# Altium PCB CH32F103C-R0-1v1.PcbDoc
Units mil, origin at the board's own origin, x right, y up, seen from the top; angles counter-clockwise.
Board outline 1801.31 x 2018.15 mil, 2 copper layers (TopLayer, BottomLayer); 40 components, 57 nets, 204 pads, 156 vias.
Unrouted connection lines stored in the file: 2.
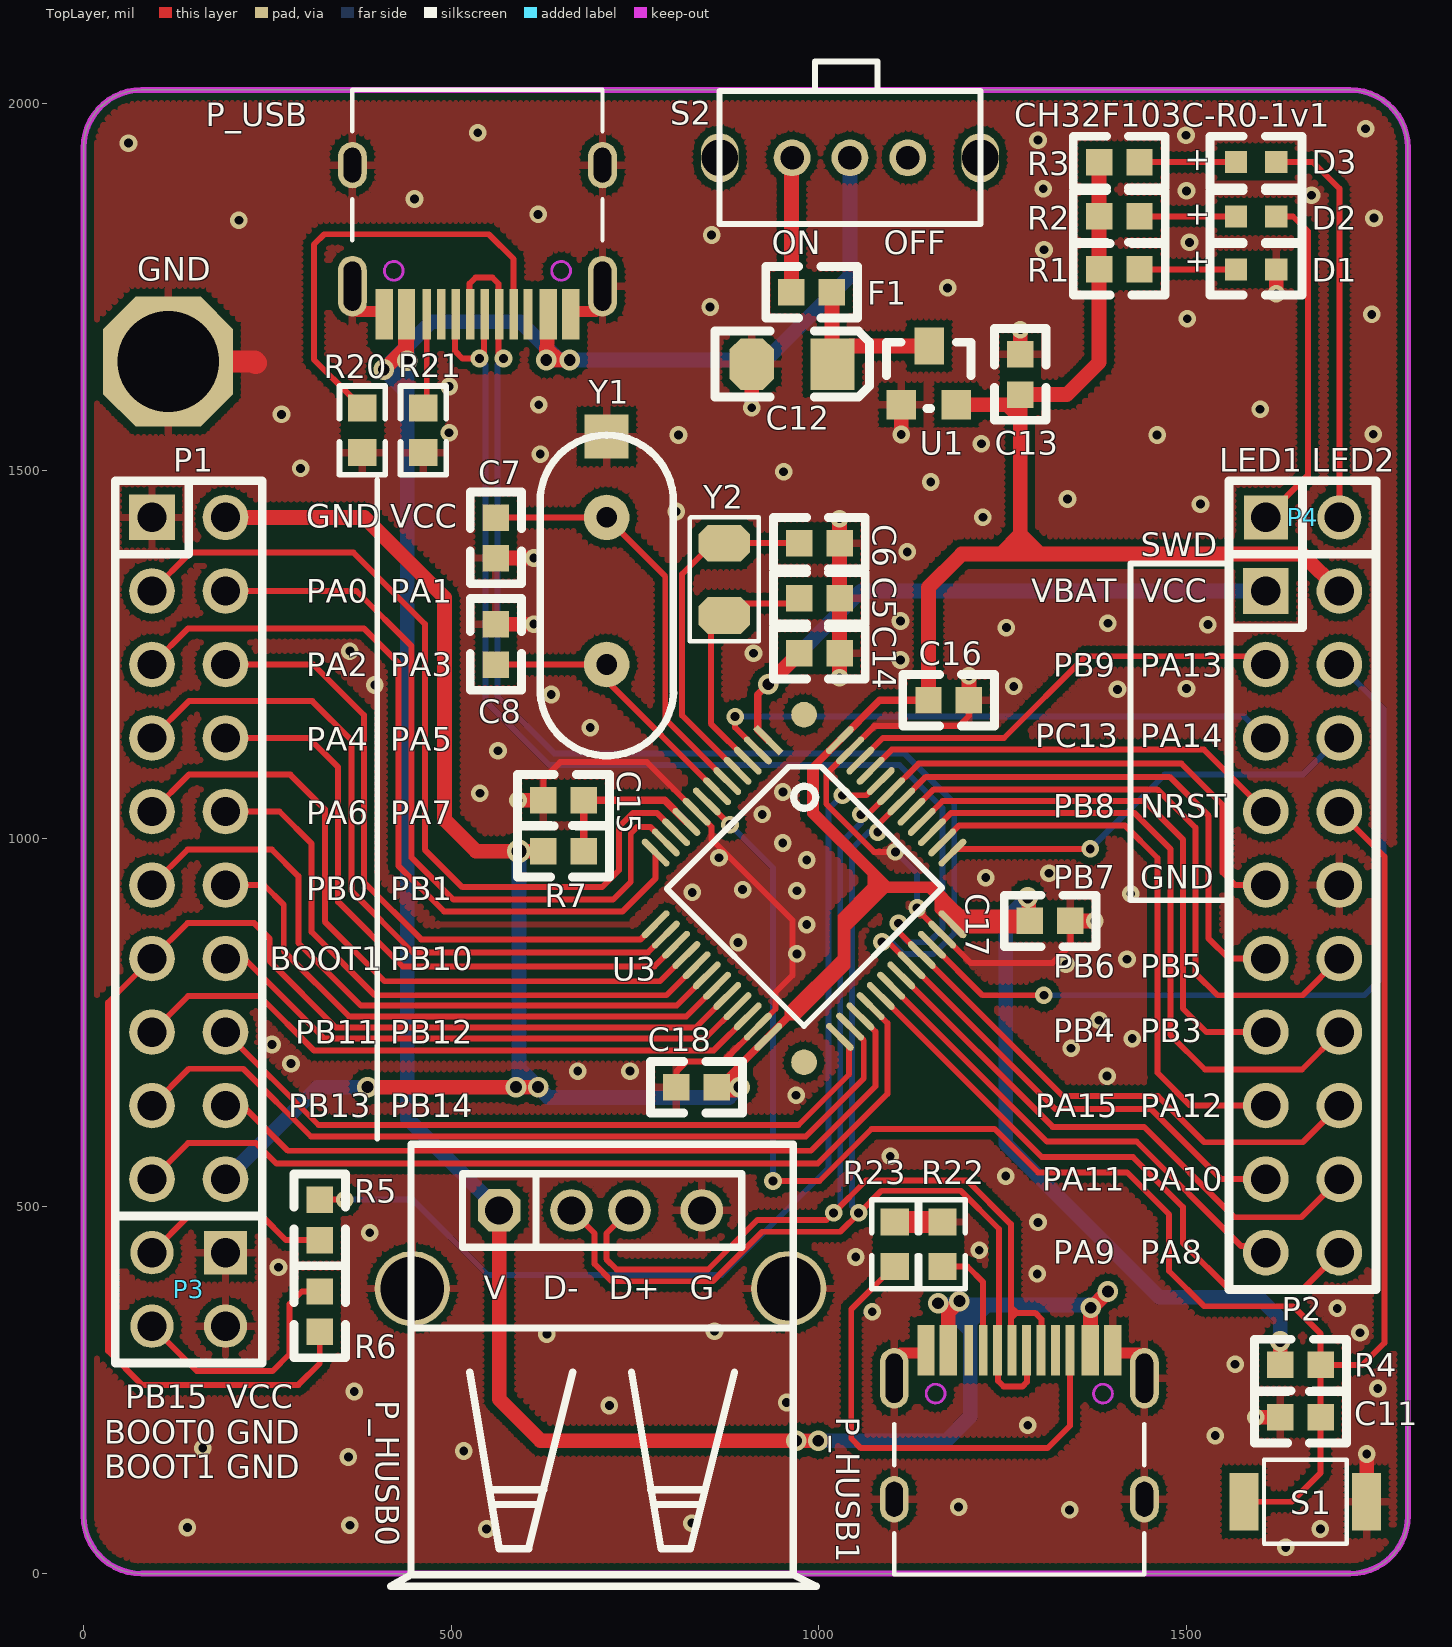
[diagram p0: TopLayer view]
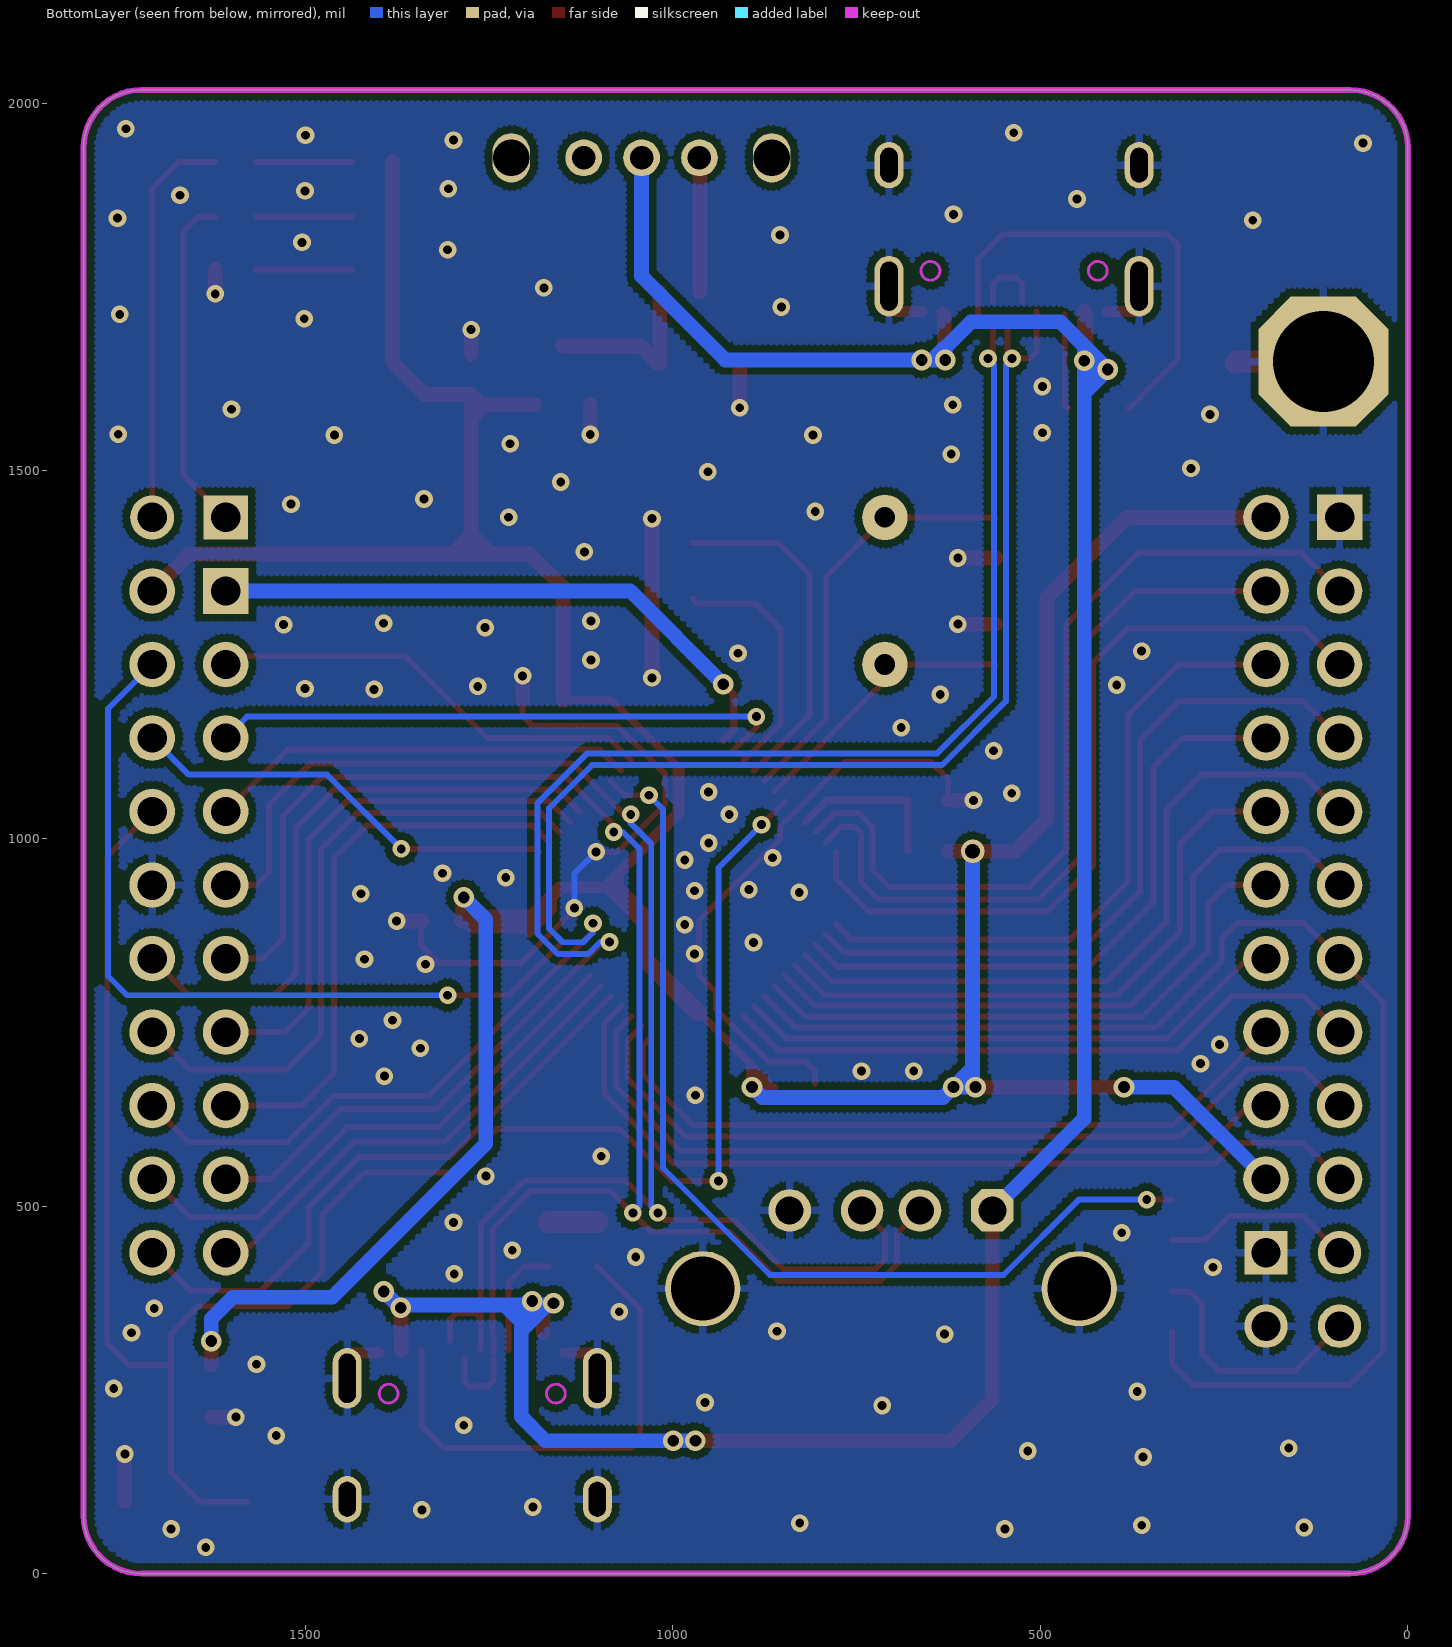
[diagram p1: BottomLayer view, seen from below]

## Layer stack, top to bottom
TopSolder: solder mask 0.4, Solder Resist, Dk 3.5
TopLayer: signal copper 1.4
Dielectric1: dielectric 12.6, FR-4, Dk 4.8
BottomLayer: signal copper 1.4
BottomSolder: solder mask 0.4, Solder Resist, Dk 3.5

## Board outline
0,78.74 0,1939.41 cw(c78.74,1939.41) 78.74,2018.15 1722.6,2018.15 cw(c1722.6,1939.43) 1801.31,1939.43 1801.31,78.74 cw(c1722.57,78.74) 1722.57,0 78.74,0 cw(c78.74,78.74)

## Design rules (kind name [scope] priority, off if disabled: settings)
Clearance Clearance_1 [InPolygon] p1: gap=10 ignorepadtopadclearanceinfootprint=FALSE
Clearance [All] p2: gap=6 ignorepadtopadclearanceinfootprint=FALSE
ComponentClearance [All] p1 off: gap=10 collisioncheckmode=3 verticalgap=10 showdistances=FALSE
DiffPairsRouting [All] p1: maxlimit=10 minlimit=7 mostfreqgap=8 toplayer_minwidth=6 toplayer_maxwidth=15 toplayer_prefwidth=8 bottomlayer_minwidth=6 bottomlayer_maxwidth=15 bottomlayer_prefwidth=8 maxuncoupledlength=500
MinimumSolderMaskSliver [All] p1 off: minsoldermaskwidth=10
PolygonConnect PolygonConnect_1 [IsVia] p1: connectstyle=Direct reliefconductorwidth=10 reliefentries=4 polygonreliefangle="90 Angle" airgapwidth=10
PolygonConnect [All] p2: connectstyle=Relief reliefconductorwidth=10 reliefentries=4 polygonreliefangle="90 Angle" airgapwidth=10
RoutingVias [All] p1: holewidth=16 width=28 viastyle="Through Hole" minholewidth=12 minwidth=24 maxholewidth=28 maxwidth=50
SilkToSilkClearance [All] p1 off: silktosilkclearance=10
SilkToSolderMaskClearance [IsPad] p1 off: minsilkscreentomaskgap=10 clearancetoexposedcopper=TRUE
SolderMaskExpansion [All] p1: expansion=4 istentingtop=FALSE
Width [All] p1: maxlimit=100 minlimit=6 preferedwidth=10
25 further rules are at their usual default settings.

## Components (designator, comment, footprint, x,y, rotation, side; value= is the part's Value field where it differs from the comment)
C5 "12pF" 0603#1 973.18,1326.77 r0 top
C6 "12pF" 0603#1 973.18,1401.74 r0 top
C7 "22pF" 0603#1 560.83,1381.38 r90 top
C8 "22pF" 0603#1 560.83,1291.48 r270 top
C11 "0.1uF" 0603#1 1627.52,212.92 r0 top
C12 "10uF" 3216 1018.83,1645.26 r0 top
C13 "2.2uF" 0603#1 1274.18,1603.8 r90 top
C14 "0.1uF" 0603#1 973.18,1251.8 r0 top value=15pF
C15 "0.1uF" 0603#1 680.18,1051.8 r180 top value=15pF
C16 "0.1uF" 0603#1 1204.18,1187.8 r180 top value=15pF
C17 "0.1uF" 0603#1 1342.18,887.8 r180 top value=15pF
C18 "0.1uF" 0603#1 806.18,661.8 r0 top value=15pF
D1 "POWER  red" 0603L 1567.18,1774 r0 top
D2 "LED1" 0603L 1567.18,1846 r0 top
D3 "LED2" 0603L 1567.18,1920 r0 top
F1 "500mA" 0603#1 962.83,1742.76 r0 top
P1 "Header 10X2" IDC20 93.04,1436.61 r270 top
P2 "Header 10X2" IDC20 1607.99,1336.61 r270 top
P3 "Header 2X2" HDR2X2 193.05,436.62 r180 top
P4 "2HEAD" "SIP2 - 40mil" 1607.99,1436.61 r0 top
P_HUSB0 "USB_A" USBA-l 565.29,494.1 r0 top
P_HUSB1 "TYPE-C" TYPE-C-Receptacle-2.0 1272.68,303.99 r0 top
P_USB "TYPE-C" TYPE-C-Receptacle-2.0 535.68,1713 r180 top
R1 "1K" 0603#1 1436.18,1774 r180 top
R2 "1K" 0603#1 1381.18,1846 r0 top
R3 "1K" 0603#1 1381.18,1920 r0 top
R4 "10K" 0603#1 1682.52,283.92 r180 top
R5 "10K" 0603#1 321.18,508.8 r270 top
R6 "10K" 0603#1 321.18,328.8 r90 top
R7 "0Ω" 0603#1 625.18,982.8 r0 top value=10K
R20 "NC(5.1K)" 0603#2 379.18,1585.43 r270 top
R21 "NC(5.1K)" 0603#2 462.18,1585.43 r270 top
R22 "NC(5.1K)" 0603#2 1168.18,417.8 r90 top
R23 "NC(5.1K)" 0603#2 1103.18,417.8 r90 top
S1 "KEY" 贴片按键 1578.18,97.8 r0 top
S2 "SW" KEY2 1199.83,1925.76 r180 top
U1 "6219P33M" "SOT-23 - IC" 1112.18,1589.8 r0 top
U3 "CH32F103C" LQFP48 931.18,1133.8 r225 top locked
Y1 "8M" XT62/28 711.45,1236.61 r0 top
Y2 "32.768k" FC-135 871.58,1303.24 r90 top

## Footprints (in the part's own frame and the unit in brackets; to place one, negate y for a bottom-side part, rotate by r counter-clockwise, add the part's x,y. Pads: shape width x height; smd on the part's side, far side on the other; paste and mask are expansions set on the pad)
0603#1 [mil]
  rect 36x36 smd: 1(0,0) 2(55,0)
  silkscreen extent -35,-35 90,35
0603#2 [mil]
  rect 36.61x38.58 smd: 1(0,0) 2(60.63,0)
  silkscreen extent -30,-31 91,31
0603L [mil]
  rect 30x30 smd: 1(0,0) 2(55,0)
  silkscreen extent -35,-35 90,35
3216 [mil]
  rect 60x70 smd: 1(0,0)
  oct 60x70 smd: 2(-110,0)
  silkscreen extent -160,-45 50,45
FC-135 [mil]
  oct 50x70 smd: 1(0,0) 2(98.43,0)
  silkscreen extent -35,-47 133,47
HDR2X2 [mm]
  rect 1.5x1.5 hole 1.016: 1(0,0)
  round 1.5 hole 1.016: 2(0,2.54) 3(2.54,0) 4(2.54,2.54)
  silkscreen extent -1.27,-1.27 3.81,3.81
IDC20 [mil]
  rect 62x62 hole 40: 1(0,0)
  round 62 hole 40: 2(0,100) 3(100,0) 4(100,100) 5(200,0) 6(200,100) 7(300,0) 8(300,100) 9(400,0) 10(400,100) 11(500,0) 12(500,100) 13(600,0) 14(600,100) 15(700,0) 16(700,100) 17(800,0) 18(800,100) 19(900,0) 20(900,100)
  silkscreen extent -50,-50 950,150
KEY2 [mm]
  oval 1.3x1.7 hole 1.27: 0(-0.5,0) 0(8.5,0)
  round 1.27 hole 0.813: 1(4,0) 2(2,0) 3(6,0)
  silkscreen extent -0.51,-3.32 8.5,2.29
LQFP48 [mm]
  round 0.889 smd: 0(-1.496,0.254) 0(6.996,8.746)
  rect 0.229x1.27 smd: 1(0,0)
  oval 0.229x1.27 smd: 2(0.5,0) 3(1,0) 4(1.5,0) 5(2,0) 6(2.5,0) 7(3,0) 8(3.5,0) 9(4,0) 10(4.5,0) 11(5,0) 12(5.5,0) 25(5.5,9) 26(5,9) 27(4.5,9) 28(4,9) 29(3.5,9) 30(3,9) 31(2.5,9) 32(2,9) 33(1.5,9) 34(1,9) 35(0.5,9) 36(0,9)
  oval 1.27x0.229 smd: 13(7.25,1.75) 14(7.25,2.25) 15(7.25,2.75) 16(7.25,3.25) 17(7.25,3.75) 18(7.25,4.25) 19(7.25,4.75) 20(7.25,5.25) 21(7.25,5.75) 22(7.25,6.25) 23(7.25,6.75) 24(7.25,7.25) 37(-1.75,7.25) 38(-1.75,6.75) 39(-1.75,6.25) 40(-1.75,5.75) 41(-1.75,5.25) 42(-1.75,4.75) 43(-1.75,4.25) 44(-1.75,3.75) 45(-1.75,3.25) 46(-1.75,2.75) 47(-1.75,2.25) 48(-1.75,1.75)
  silkscreen extent -0.65,1.15 6.11,7.86
"SIP2 - 40mil" [mil]
  rect 60x60 hole 40: 1(0,0)
  round 60 hole 40: 2(100,0)
  silkscreen extent -50,-50 150,50
"SOT-23 - IC" [mil]
  rect 40x40 smd: 1(0,0) 2(75,0)
  rect 40x50 smd: 3(38,80)
  silkscreen extent -20,-5 95,85
TYPE-C-Receptacle-2.0 [mm]
  oval 1x1.6 hole 0.6 slot 1.2 at 90 deg: 0(-4.32,-5.15) 0(4.32,-5.15)
  oval 1x2.1 hole 0.6 slot 1.7 at 90 deg: 0(-4.32,-0.97) 0(4.32,-0.97)
  rect 0.6x1.75 smd: A1(-3.225,0) A4(-2.45,0) B1(3.225,0) B4(2.45,0)
  rect 0.3x1.75 smd: A5(-1.25,0) A6(-0.25,0) A7(0.25,0) A8(1.25,0) B5(1.75,0) B6(0.75,0) B7(-0.75,0) B8(-1.75,0)
  KeepOutLayer circle w0.1: c2.89,-1.5 r0.325
  KeepOutLayer circle w0.1: c-2.89,-1.5 r0.325
  silkscreen extent -4.32,-7.75 4.32,-2.55
USBA-l [mm]
  oct 1.473x1.473 hole 0.965: 1(0,0)
  round 1.473 hole 0.965: 2(2.5,0) 3(4.5,0) 4(7,0)
  round 2.6 hole 2.2: 5(-3,-2.7) 6(10,-2.7)
  silkscreen extent -3.75,-12.99 10.95,2.29
XT62/28 [mil]
  rect 60x60 smd: 0(0,310)
  round 62 hole 28: 1(0,0) 2(0,200)
  silkscreen extent -91,-124 91,312
贴片按键 [mm]
  rect 1x2 smd: 1(0,0) 3(4.242,0)
  silkscreen extent 0.69,-1.45 3.55,1.45

## Part data
C5 C6 C7 C8 C11 C14 C15 C16 C17 C18: library part Cap, "Capacitor", LatestRevisionDate=17-Jul-2002, LatestRevisionNote="Re-released for DXP Platform.", PackageReference=RAD-0.3, Published=8-Jun-2000, Publisher="Altium Limited"
C12 C13: library part CAP, "Capacitor"
D1 D2 D3: library part LED0, "Typical INFRARED GaAs LED", LatestRevisionDate=08-Jul-2005, LatestRevisionNote="Mech Layer 1 removed.", PackageReference=LED-0, Published=8-Jun-2000, Publisher="Altium Limited"
F1: library part FUSE1, "Fuse"
P1 P2: "Header, 10-Pin, Dual row", LatestRevisionDate=17-Jul-2002, LatestRevisionNote="Re-released for DXP Platform.", Publisher="Altium Limited"
P3: "Header, 2-Pin, Dual row", LatestRevisionDate=17-Jul-2002, LatestRevisionNote="Re-released for DXP Platform.", Publisher="Altium Limited"
P_HUSB0: library part USB, "USB Port"
P_HUSB1 P_USB: library part TYPE-C1
R1 R2 R3: library part "Res Semi", "Semiconductor Resistor", LatestRevisionDate=17-Jul-2002, LatestRevisionNote="Re-released for DXP Platform.", PackageReference=AXIAL-0.5, Published=8-Jun-2000, Publisher="Altium Limited"
R4 R5 R6 R7 R20 R21 R22 R23: library part Res2, "Resistor"
  R4 R5 R6 R7: LatestRevisionDate=17-Jul-2002, LatestRevisionNote="Re-released for DXP Platform.", PackageReference=AXIAL-0.4, Published=8-Jun-2000, Publisher="Altium Limited"
U3: "ARM M3 MCU with USB device & USB host & ADC & 12bit DAC & Touch Key & CAN"
Y1 Y2: library part XTAL, "Crystal Oscillator", LatestRevisionDate=17-Jul-2002, LatestRevisionNote="Re-released for DXP Platform.", PackageReference=R38, Published=8-Jun-2000, Publisher="Altium Limited"

## Free pads (board coordinates)
  oct 177.17x177.17 hole 137.8: 0(114.98,1648.6)

## Via types
v1: diameter 24, hole 12, TopLayer to BottomLayer, tented both sides, 138 vias
v2: diameter 28, hole 16, TopLayer to BottomLayer, tented both sides, 17 vias
v3: diameter 32, hole 20, TopLayer to BottomLayer, tented both sides, 1 vias

## Nets (pads, with @x,y where several pads share a name; then routed paths per layer and width w, separated by ;. In a path a pad name is that pad's centre, name@x,y a point inside that pad or via, vN(x,y) a via of type N, cw(c..) or ccw(c..) an arc to the next point about the centre after c; other vN are vias at no path point)
+5V: P_HUSB0.1 P_HUSB1.A4 P_HUSB1.B4 P_USB.A4 P_USB.B4 S2.1 | length 4203
  TopLayer w20: v2(408.18,1637.8) 437.41,1667.03 437.41,1711.19 P_USB.B4 439.7,1712.52 439.7,1650.28 v2(440.18,1649.8) ; P_USB.B4@440.18,1679.8 440.18,1716.41 P_USB.B4@440.42,1716.65 ; P_HUSB0.1 565.29,237.09 621.58,180.8 v2(969.18,180.8) v2@997.18,180.8 ; P_USB.A4 630.66,1711.52 630.66,1665.53 ; v2@657.18,1650.8 645.39,1650.8 ; P_HUSB1.A4@1175.97,327.95 1175.97,355.59 v2(1191.18,370.8) ; P_HUSB1.B4 1369.14,359.76 v2@1369.95,360.56 ; P_HUSB1.B4@1369.95,324.95 v2@1369.95,360.56 ; v2(1393.18,383.8) v2@1369.95,360.56 ; v2@629.39,1651.01 630.66,1652.28 630.66,1665.53 ; v2@629.39,1651.01 v2(629.18,1650.8) 645.39,1650.8 ; v2@629.39,1651.01 629.39,1666.8 630.66,1665.53 ; 630.66,1665.53 645.39,1650.8
  BottomLayer w20: P_HUSB0.1 440.18,619.21 440.18,1605.8 ; v2@634.94,1662.04 594.18,1702.8 473.18,1702.8 440.18,1669.8 ; v2(661.18,1650.8) 928.39,1650.8 1042.35,1764.76 S2.1 ; v2(969.18,180.8) 1173.18,180.8 1206.18,213.8 1206.18,330.37 ; v2(1162.18,367.8) 1168.76,367.8 v2@1170.97,365.59 ; v2(1191.18,370.8) v2@1192.71,369.27 ; v2(1393.18,383.8) 1374.97,365.59 1229.18,365.59 ; v2@409.71,1639.33 440.18,1669.8 ; v2@409.71,1639.33 v2(408.18,1637.8) 440.18,1605.8 ; v2@409.71,1639.33 427.55,1639.33 438.02,1649.8 v2(440.18,1649.8) ; 440.18,1605.8 v2(440.18,1649.8) ; v2(440.18,1649.8) 440.18,1669.8 ; v2@1170.97,365.59 v2@1192.71,365.59 ; v2@1170.97,365.59 1192.71,343.84 ; 1192.71,343.84 v2@1192.71,365.59 ; 1192.71,343.84 1206.18,330.37 ; v2@1192.71,365.59 v2@1198.56,365.59 ; v2@1192.71,365.59 v2@1192.71,369.27 ; v2@1192.71,369.27 v2@1194.88,369.27 ; v2@1194.88,369.27 v2@1198.56,365.59 ; v2@1194.88,369.27 1198.37,369.27 v2@1202.05,365.59 ; v2@1198.56,365.59 1210.06,354.09 1217.68,354.09 ; v2@1198.56,365.59 v2@1202.05,365.59 ; v2@1202.05,365.59 1229.18,365.59 ; 1206.18,330.37 1206.18,342.59 1217.68,354.09 ; 1217.68,354.09 1229.18,365.59 ; v2(629.18,1650.8) 647.18,1650.8 629.18,1668.8 v2(629.18,1650.8)
  other v2: 999.18,180.8 1369.95,361.59
BOOT0: R5.1 U3.44 | length 1369.8
  TopLayer w8: R5.1 v1(355.18,508.8) ; v1(1032.18,1058.8) 1064.97,1058.8 U3.44
  BottomLayer w8: v1(355.18,508.8) 447.58,508.8 550.18,406.2 867.58,406.2 1013.18,551.8 1013.18,1039.8 v1(1032.18,1058.8)
BOOT1: P1.13 R6.1 U3.20 | length 1858.9
  TopLayer w8: R6.1 321.18,285.8 292.18,256.8 79.18,256.8 33.18,302.8 33.18,776.76 P1.13 141.22,884.8 232.18,884.8 253.18,863.8 253.18,832.8 343.18,742.8 832.49,742.8 U3.20 846.49,756.8
GND: C5.2 C6.2 C7.1 C8.1 C11.1 C12.2 C13.2 C14.2 C15.2 C16.1 C17.1 C18.1 D1.2 P1.1 P2.10 P3.1 P3.2 P_HUSB0.4 P_HUSB0.5 P_HUSB0.6 P_HUSB1.0 P_HUSB1.A1 P_HUSB1.B1 P_USB.0 P_USB.A1 P_USB.B1 pad.0 R20.2 R21.2 R22.2 R23.2 S1.3 U1.1 U3.8 U3.23 U3.35 U3.47 Y1.0 | length 2635.6
  TopLayer w8: C15.2 625.18,1080.8 648.18,1103.8 766.31,1103.8 U3.8 854.18,1015.93 854.18,998.8 964.18,888.8 964.18,813.8 941.18,790.8 941.18,767.98 U3.23 870.01,696.8 820.18,696.8 806.18,682.8 C18.1@806.18,666.8 ; v1(1104.18,981.8) 1075.18,981.8 1010.18,1046.8 1010.18,1087.52 U3.47 1075.46,1152.8 1190.18,1152.8 1204.18,1166.8 C16.1 ; v1(1133.76,905.38) 1133.76,903.38 U3.35 1206.34,830.8 1318.18,830.8 1342.18,854.8 C17.1
  TopLayer w15: P_USB.0@364.63,1724.8 372.78,1716.65 P_USB.B1@408.92,1716.65 ; P_USB.A1@660.89,1716.65 697.03,1716.65 P_USB.0@705.18,1724.8 ; P_HUSB1.0@1103.18,291.8 1111.33,299.95 P_HUSB1.A1@1147.47,299.95 ; P_HUSB1.B1@1399.44,299.95 1435.58,299.95 P_HUSB1.0@1443.73,291.8
  TopLayer w20: C8.1 v1(612.18,1291.48) ; C7.1 v1(612.18,1381.38) ; v1(590.83,1051.8) C15.2 ; v1(908.83,1585.8) C12.2 ; v1(1028.18,1218.46) C14.2 C5.2 C6.2 v1(1028.18,1435.07) ; v1(1112.18,1549.46) U1.1 ; C16.1 v1(1204.18,1221.14) ; C13.2 v1(1274.18,1692.14) ; C17.1 v1(1375.52,887.8) ; v1(1594.18,212.92) C11.1 ; v1(1622.18,1740.66) D1.2 ; S1.3 v1(1745.18,162.8)
  TopLayer w30: pad.0 232.38,1648.6 234.18,1646.8 ; R23.2 R22.2
  BottomLayer w8: v1(1104.18,981.8) 1133.76,952.22 v1(1133.76,905.38)
  other v1: 1635.18,35.8 548.18,60.8 1682.21,60.8 141.18,62.8 362.18,65.8 827.18,68.8 1341.18,86.8 1190.18,90.76 360.18,158.8 517.18,166.8 162.18,170.76 1539.18,187.8 1284.18,201.8 715.18,228.8 956.18,232.8 368.18,247.8 1760.18,251.8 1566.18,284.8 630.18,325.8 1736.18,327.8 858.21,329.8 1072.74,356.24 1705.18,360.8 1297.18,407.8 265.18,416.8 1050.18,430.8 1218.18,439.8 389.18,463.8 1298.18,477.8 1254.18,540.8 1097.18,567.8 969.18,650.76 1392.18,676.8 672.18,683.6 743.18,683.6 282.21,693.8 1343.18,714.76 256.18,719.8 1426.21,727.8 1381.18,752.8 1336.18,828.8 1419.18,835.8 970.18,843 890.21,858.4 983.58,882.76 1424.18,924.8 827.98,926.6 970.18,929 896.38,930.4 1227.18,946.76 1313.18,952.8 983.58,970.76 864.18,973.8 950.98,993.8 923.18,1032.8 538.98,1061.6 951.18,1063.2 563.58,1119.2 689.18,1150.8 636.18,1195.8 1406.18,1202.8 1500.18,1203.8 1265.18,1206.8 396.18,1208.8 1111.18,1242.76 911.18,1251.8 362.21,1254.8 1255.18,1286.8 1529.18,1290.8 1393.18,1292.8 1111.18,1295.8 1120.18,1389.8 1223.18,1436.8 806.18,1444.8 1519.18,1454.8 1338.21,1461.8 1152.18,1484.8 952.18,1498.76 295.18,1503.4 621.18,1522.8 1221.18,1536.8 809.18,1548.8 1460.18,1548.8 1754.18,1549.8 497.18,1551.8 269.18,1576.8 1600.18,1583.8 619.18,1589.8 497.18,1614.8 1501.18,1706.76 1752.18,1712.8 852.18,1722.76 1175.18,1748.8 1306.21,1800.8 1504.18,1810.76 854.18,1820.8 211.18,1840.8 1755.18,1843.8 618.21,1848.8 450.18,1869.8 1670.18,1874.76 1500.18,1880.8 1305.18,1883.8 61.18,1945.8 1298.18,1949.8 1499.38,1956.4 536.18,1959.8 1743.78,1965.4
LED1: D2.2 P4.1 | length 464.2
  TopLayer w8: P4.1 1665.18,1493.81 1665.18,1825.8 1644.98,1846 D2.2
LED2: D3.2 P4.2 | length 548.1
  TopLayer w8: D3.2 1671.98,1920 1707.99,1883.99 P4.2
NetD1_1: D1.1 R1.1 | length 131
  TopLayer w8: R1.1 D1.1
NetD2_1: D2.1 R2.2 | length 131
  TopLayer w8: R2.2 D2.1
NetD3_1: D3.1 R3.2 | length 131
  TopLayer w8: R3.2 D3.1
NetF1_1: F1.1 S2.3 | length 183.3
  TopLayer w20: F1.1 962.83,1924.98 S2.3
NetP3_3: P3.3 R5.2 | length 262.6
  TopLayer w8: P3.3 143.24,486.8 242.18,486.8 275.18,453.8 R5.2
NetP3_4: P3.4 R6.2 | length 337.9
  TopLayer w8: P3.4 153.87,275.8 257.18,275.8 280.18,298.8 280.18,366.8 297.18,383.8 R6.2
NetP_HUSB1_A5: P_HUSB1.A5 R22.1 | length 156.6
  TopLayer w8: R22.1 1202.18,417.8 1223.47,396.51 P_HUSB1.A5
NetP_HUSB1_B5: P_HUSB1.B5 R23.1 | length 677.2
  TopLayer w8: R23.1 1102.2,417.8 1044.18,359.78 1044.18,183.8 1057.18,170.8 1311.18,170.8 1341.58,201.2 P_HUSB1.B5
NetP_USB_A5: P_USB.A5 R20.1 | length 616.8
  TopLayer w8: R20.1 378.2,1585.43 363.89,1599.74 363.89,1600.72 313.18,1651.43 313.18,1807.8 327.18,1821.8 551.18,1821.8 584.89,1788.09 P_USB.A5
NetP_USB_B5: P_USB.B5 R21.1 | length 129.5
  TopLayer w8: R21.1 466.78,1590.03 P_USB.B5
NRST: C11.2 P2.8 R4.1 S1.1 U3.7 | length 2645
  TopLayer w8: U3.7 v1(879.18,1018.8) ; v1(937.78,534.2) 1000.98,534.2 1071.58,604.8 1239.18,604.8 1298.18,545.8 1419.18,545.8 1476.18,488.8 1476.18,411.8 1524.18,363.8 1645.18,363.8 1682.52,326.46 R4.1 ; S1.1 1643.18,97.8 1682.52,137.14 C11.2 R4.1 ; P2.8 1769.18,975.42 1769.18,313.8 1739.3,283.92 R4.1
  BottomLayer w8: v1(879.18,1018.8) 937.78,960.2 v1(937.78,534.2)
PA0: P1.3 U3.10 | length 1190.1
  TopLayer w8: P1.3 145.22,1388.8 367.18,1388.8 464.18,1291.8 464.18,984.8 515.18,933.8 705.18,933.8 728.18,956.8 728.18,1015.8 747.18,1034.8 779.63,1034.8 U3.10
PA1: P1.4 U3.11 | length 1029.9
  TopLayer w8: P1.4 371.17,1336.61 446.18,1261.6 446.18,973.8 503.18,916.8 720.18,916.8 744.18,940.8 744.18,1006.8 753.18,1015.8 770.79,1015.8 U3.11
PA2: P1.5 U3.12 | length 1080.1
  TopLayer w8: P1.5 142.22,1285.8 381.18,1285.8 428.18,1238.8 428.18,962.8 490.18,900.8 733.18,900.8 778.07,945.69 U3.12
PA3: P1.6 U3.13 | length 881.3
  TopLayer w8: P1.6 312.37,1236.61 381.18,1167.8 381.18,940.8 459.18,862.8 757.62,862.8 U3.13
PA4: P1.7 U3.14 | length 991.6
  TopLayer w8: P1.7 143.22,1186.8 311.18,1186.8 364.18,1133.8 364.18,928.8 448.18,844.8 767.46,844.8 U3.14
PA5: P1.8 U3.15 | length 861.1
  TopLayer w8: P1.8 306.37,1136.61 346.18,1096.8 346.18,913.8 434.18,825.8 776.29,825.8 U3.15
PA6: P1.9 U3.16 | length 968.4
  TopLayer w8: P1.9 143.22,1086.8 281.18,1086.8 328.18,1039.8 328.18,886.8 409.18,805.8 784.13,805.8 U3.16
PA7: P1.10 U3.17 | length 831.4
  TopLayer w8: P1.10 266.37,1036.61 310.18,992.8 310.18,872.8 396.18,786.8 792.97,786.8 U3.17
PA8: P2.20 U3.29 | length 840
  TopLayer w8: U3.29 1303.31,566.8 1427.18,566.8 1495.18,498.8 1495.18,449.8 1560.18,384.8 1656.17,384.8 P2.20
PA9: P2.19 U3.30 | length 660.2
  TopLayer w8: U3.30 1310.15,587.8 1432.18,587.8 1574.1,445.88 1598.72,445.88 P2.19
PA10: P2.18 U3.31 | length 753.5
  TopLayer w8: U3.31 1317.99,607.8 1442.18,607.8 1565.18,484.8 1656.17,484.8 P2.18
PA11: P2.17 P_USB.A7 P_USB.B7 U3.32 | length 2235.6
  TopLayer w8: P_USB.A7@525.06,1729.65 525.06,1754.68 533.18,1762.8 556.18,1762.8 564.43,1754.55 P_USB.B7@564.43,1729.65 ; P_USB.B7@564.43,1695.65 564.43,1659.55 v1(571.18,1652.8) ; v1(1085.95,859.15) 1094.47,859.15 U3.32 1321.83,631.8 1452.18,631.8 1547.37,536.61 P2.17
  BottomLayer w8: v1(571.18,1652.8) 562.88,1644.5 562.88,1193.1 640.18,1115.8 1116.18,1115.8 1184.18,1047.8 1184.18,870.8 1156.18,842.8 1114.99,842.8 1098.64,859.15 v1(1085.95,859.15)
PA12: P2.16 P_USB.A6 P_USB.B6 U3.33 | length 2288.8
  TopLayer w8: P_USB.B6@505.38,1716.65 P_USB.B6@505.38,1712.22 ; P_USB.B6 P_USB.B6@505.38,1712.22 ; P_USB.A6@544.75,1695.65 544.75,1658.97 v1(538.58,1652.8) 515.18,1652.8 505.38,1662.6 P_USB.B6@505.38,1712.22 ; v1(1108.45,884.65) 1108.45,873.01 U3.33 1331.67,649.8 1461.18,649.8 1524.18,586.8 1658.17,586.8 P2.16
  BottomLayer w8: v1(538.58,1652.8) 546.88,1644.5 546.88,1186.47 633.55,1099.8 1109.55,1099.8 1168.18,1041.17 1168.18,877.43 1149.55,858.8 1121.62,858.8 1108.45,871.97 v1(1108.45,884.65)
PA13: P2.4 U3.34 | length 1102.2
  TopLayer w8: U3.34 1222.5,786.8 v1(1306.18,786.8)
  BottomLayer w8: v1(1306.18,786.8) 1742.18,786.8 1768.18,812.8 1768.18,1176.42 P2.4
PA14: P2.6 U3.37 | length 590.8
  TopLayer w8: U3.37 1186.84,985.8 v1(1369.18,985.8)
  BottomLayer w8: v1(1369.18,985.8) 1470.19,1086.81 1658.18,1086.81 P2.6
PA15: P2.15 U3.38 | length 778.7
  TopLayer w8: U3.38 1191.01,1017.8 1416.18,1017.8 1460.68,973.3 1460.68,681.3 1505.37,636.61 P2.15
PB0: P1.11 U3.18 | length 932.6
  TopLayer w8: P1.11 141.22,984.8 256.18,984.8 292.18,948.8 292.18,857.8 377.18,772.8 806.81,772.8 U3.18
PB1: P1.12 U3.19 | length 796.9
  TopLayer w8: P1.12 245.37,936.61 272.18,909.8 272.18,846.8 361.18,757.8 819.65,757.8 U3.19
PB3: P2.14 U3.39 | length 878.8
  TopLayer w8: U3.39 1180.17,1034.8 1429.18,1034.8 1478.18,985.8 1478.18,732.8 1525.18,685.8 1657.17,685.8 P2.14
PB4: P2.13 U3.40 | length 744.6
  TopLayer w8: U3.40 1168.33,1050.8 1443.18,1050.8 1495.18,998.8 1495.18,768.8 1527.37,736.61 P2.13
PB5: P2.12 U3.41 | length 847.1
  TopLayer w8: U3.41 1156.49,1066.8 1460.18,1066.8 1512.18,1014.8 1512.18,816.8 1542.18,786.8 1658.17,786.8 P2.12
PB6: P2.11 P_HUSB0.2 P_HUSB1.A7 P_HUSB1.B7 U3.42 | length 2303.4
  TopLayer w8: P_HUSB0.2 695.09,462.73 695.09,421.17 718.46,397.8 855.81,397.8 923.01,465 1029.32,465 1054.65,490.33 1085.12,520.8 1193.18,520.8 1245.18,468.8 1245.18,322.02 1243.93,320.76 P_HUSB1.B7@1243.93,299.95 ; v1(1080.18,1008.8) 1080.18,1018.33 U3.42 1145.65,1083.8 1477.18,1083.8 1530.18,1030.8 1530.18,863.8 1557.37,836.61 P2.11 ; P_HUSB1.B7@1243.93,292.95 1243.93,262.05 1251.18,254.8 1277.18,254.8 1283.3,260.92 P_HUSB1.A7@1283.3,292.95
  BottomLayer w8: v1(1054.18,490.8) 1045.18,499.8 1045.18,985.99 1068,1008.8 v1(1080.18,1008.8)
PB7: P2.9 P_HUSB0.3 P_HUSB1.A6 P_HUSB1.B6 U3.43 | length 2237.2
  TopLayer w8: P_HUSB0.3 711.09,462.73 711.09,427.8 725.09,413.8 849.18,413.8 916.38,481 1010.38,481 v1(1020.18,490.8) 1064.18,534.8 1201.81,534.8 1261.18,475.43 1261.18,362.8 ; v1(1057.18,1032.8) 1066.81,1032.8 U3.43 1135.81,1101.8 1493.18,1101.8 1549.18,1045.8 1549.18,953.8 1566.37,936.61 P2.9 ; P_HUSB1.A6 1261.18,305.65 1261.18,347.5 ; P_HUSB1.B6@1302.98,316.95 1302.98,346 1294.18,354.8 1269.18,354.8 ; 1261.18,347.5 1261.18,354.8 ; 1261.18,347.5 1268.48,354.8 ; 1261.18,354.8 1268.48,354.8 ; 1261.18,354.8 1261.18,362.8 ; 1261.18,362.8 1269.18,354.8 ; 1268.48,354.8 1269.18,354.8
  BottomLayer w8: v1(1020.18,490.8) 1029.18,499.8 1029.18,992.61 1057.18,1020.61 v1(1057.18,1032.8)
PB8: P2.7 U3.45 | length 584.4
  TopLayer w8: U3.45 1099.13,1120.8 1523.8,1120.8 P2.7
PB9: P2.3 U3.46 | length 614.9
  TopLayer w8: U3.46 1087.11,1136.61 1252,1136.61 1363.18,1247.8 1596.8,1247.8 P2.3
PB10: P1.14 U3.22 | length 759.7
  TopLayer w8: P1.14 218.37,836.61 327.18,727.8 845.33,727.8 889.42,771.89
PB11: P1.15 U3.21 | length 880.5
  TopLayer w8: P1.15 142.22,785.8 239.18,785.8 313.18,711.8 857.17,711.8 903.34,757.98
PB12: P1.16 U3.25 | length 985.3
  TopLayer w8: P1.16 319.45,610.2 972.38,610.2 1041.18,679 1041.18,717.57 U3.25
PB13: P1.17 U3.26 | length 1138
  TopLayer w8: P1.17 143.22,686.8 217.18,686.8 309.38,594.6 982.18,594.6 1061.18,673.6 1061.18,725.41 U3.26
PB14: P1.18 U3.27 | length 1049.5
  TopLayer w8: P1.18 216.37,636.61 277.78,575.2 989.38,575.2 1077.18,663 1077.18,737.25 U3.27
PB15: P1.19 U3.28 | length 1200.2
  TopLayer w8: P1.19 142.22,585.8 234.21,585.8 262.21,557.8 998.58,557.8 1093.18,652.4 1093.18,749.09 U3.28
PC13: P2.5 U3.2 | length 792.6
  TopLayer w8: v1(886.18,1165.76) 886.18,1150.96 U3.2
  BottomLayer w8: v1(886.18,1165.76) 1578.84,1165.76 P2.5
PC14: C5.1 U3.3 Y2.1 | length 337
  TopLayer w8: U3.3 853.18,1156.12 853.18,1284.84 Y2.1 888.14,1319.8 966.21,1319.8 C5.1
PC15: C6.1 U3.4 Y2.2 | length 475.3
  TopLayer w8: U3.4 814.18,1167.28 814.18,1359.8 856.04,1401.66 Y2.2 973.11,1401.66 C6.1
PD0: C7.2 U3.5 Y1.2 | length 577.2
  TopLayer w8: C7.2 711.23,1436.38 Y1.2 711.45,1436.16 791.18,1356.43 791.18,1162.44 U3.5
PD1: C8.2 U3.6 Y1.1 | length 385.3
  TopLayer w8: C8.2 711.33,1236.48 Y1.1 711.45,1214.34 U3.6
V5V: C12.1 F1.2 U1.3 | length 239.4
  TopLayer w20: F1.2 1017.83,1646.26 C12.1 1043.37,1669.8 U1.3
VBAT: C14.1 P2.1 U3.1 | length 876.3
  TopLayer w10: U3.1 917.18,1147.8 917.18,1195.8 v2(931.18,1209.8)
  TopLayer w20: v2(931.18,1209.8) C14.1
  BottomLayer w20: v2(931.18,1209.8) 1058,1336.61 P2.1
VCC: C13.1 C16.2 C17.2 C18.2 P1.2 P1.20 P2.2 R1.2 R2.1 R3.1 R4.2 R7.1 U1.2 U3.24 U3.36 U3.48 | length 6900.5
  TopLayer w10: C16.2 1082.62,1187.8 U3.48 995.18,1100.36 ; U3.36@1195.18,869.8 U3.36@1189.18,875.8 ; C18.2@862.84,661.8 881.18,680.14 ; C18.2@862.84,661.8 C18.2 870.18,652.8 v2@882.18,652.8 ; C18.2@862.84,661.8 C18.2@876.18,661.8 ; C18.2@876.18,661.8 v2@881.18,661.8 ; C18.2@876.18,661.8 v2@881.18,666.8 ; v2@881.18,661.8 890.01,670.63 890.01,675.63 ; v2@881.18,661.8 v2@881.18,666.8 ; v2@881.18,661.8 v2@891.18,661.8 ; v2@881.18,666.8 890.01,675.63 ; v2@881.18,666.8 881.18,680.14 ; 881.18,680.14 890.01,688.97 ; v2@882.18,652.8 v2@891.18,661.8 ; v2@882.18,652.8 886.18,652.8 v2@895.18,661.8 ; 890.01,675.63 895.18,680.8 ; 890.01,675.63 890.01,688.97 ; 890.01,688.97 895.18,694.14 ; v2@891.18,661.8 v2(892.18,661.8) v2@895.18,661.8 ; v2@895.18,661.8 895.18,680.8 ; 895.18,680.8 895.18,694.14 ; 895.18,694.14 U3.24 958.51,757.47 ; 958.51,757.47 958.51,766.13 1030.18,837.8 1030.18,869.8 ; 958.51,757.47 1038.18,837.14 ; 958.51,757.47 969.85,757.47 1038.18,825.8 1038.18,837.14 ; 989.18,1041.8 989.18,1094.36 995.18,1100.36 ; 989.18,1041.8 995.18,1035.8 ; 989.18,1041.8 989.18,1033.8 1071.14,951.84 ; 995.18,1035.8 1094.18,936.8 ; 995.18,1035.8 995.18,1100.36 ; 1030.18,869.8 1030.18,880.8 ; 1030.18,869.8 1038.18,877.8 ; 1030.18,880.8 1030.18,893.84 1071.14,934.8 ; 1030.18,880.8 1078.18,928.8 ; 1038.18,837.14 1038.18,877.8 ; 1038.18,877.8 1078.18,917.8 ; 1071.14,934.8 1078.18,941.84 ; 1071.14,934.8 1071.14,951.84 ; 1071.14,951.84 1078.18,944.8 ; 1078.18,917.8 1091.18,930.8 1100.18,930.8 ; 1078.18,917.8 1078.18,928.8 ; 1078.18,928.8 1078.18,941.84 ; 1078.18,928.8 1086.18,936.8 ; 1078.18,941.84 1078.18,944.8 ; 1078.18,944.8 1086.18,936.8 ; 1086.18,936.8 1094.18,936.8 ; 1094.18,936.8 1100.18,930.8 ; 1094.18,936.8 1155.18,936.8 1161.18,930.8 ; 1100.18,930.8 1149.18,930.8 ; 1149.18,930.8 1161.18,930.8 ; 1149.18,930.8 1162.18,917.8 ; 1161.18,930.8 1181.73,910.25 ; 1162.18,917.8 1170.68,909.3 ; 1162.18,917.8 1162.18,902.8 U3.36@1170.68,894.3 ; U3.36@1170.68,894.3 U3.36@1175.68,889.3 ; U3.36@1170.68,894.3 1170.68,909.3 ; 1170.68,909.3 1175.68,904.3 ; U3.36@1175.68,889.3 U3.36 ; U3.36@1175.68,889.3 1175.68,904.3 ; 1175.68,904.3 1181.73,898.25 ; U3.36 1182.28,883.8 1196.18,883.8 ; U3.36 U3.36@1189.18,875.8 ; U3.36 1181.73,898.25 ; 1181.73,898.25 1193.73,898.25 ; 1181.73,898.25 1188.68,891.3 ; 1181.73,898.25 1181.73,910.25 ; 1181.73,910.25 1193.73,898.25 ; 1188.68,891.3 1200.68,891.3 ; 1188.68,891.3 1196.18,883.8 ; U3.36@1189.18,875.8 1242.18,875.8 ; 1193.73,898.25 1200.68,891.3 ; 1193.73,898.25 1276.73,898.25 1285.68,889.3 C17.2 1275.18,875.8 1242.18,875.8 ; 1196.18,883.8 1208.18,883.8 ; 1200.68,891.3 1250.68,891.3 1254.18,887.8 1250.18,883.8 ; 1200.68,891.3 1208.18,883.8 ; 1208.18,883.8 1250.18,883.8 ; 1242.18,875.8 1250.18,883.8
  TopLayer w20: P1.2 381.97,1436.61 490.98,1327.6 490.98,1025.6 533.78,982.8 v3(592.18,982.8) R7.1 ; v2(386.18,661.8) v2(588.18,661.8) v2(618.18,661.8) ; C16.2 1149.18,1341.8 1194.18,1386.8 1247.18,1386.8 ; U1.2 C13.1@1256.18,1589.8 ; 1254.18,887.8 C17.2 ; v2(1284.18,919.8) 1285.68,918.3 C17.2@1285.68,889.3 ; R3.1 R2.1 R1.2 1381.18,1647.8 1337.18,1603.8 C13.1 ; R4.2@1627.52,284.04 v2(1627.52,316.38) ; P2.2 1657.8,1386.8 1301.18,1386.8 ; 1247.18,1386.8 1274.18,1413.8 ; 1247.18,1386.8 1273.18,1386.8 ; C13.1@1256.18,1589.8 1274.18,1571.8 ; C13.1@1256.18,1589.8 1260.18,1589.8 C13.1 ; 1273.18,1386.8 1274.18,1387.8 1274.18,1413.8 ; 1273.18,1386.8 1301.18,1386.8 ; 1274.18,1413.8 1274.18,1571.8 ; 1274.18,1413.8 1301.18,1386.8 ; 1274.18,1571.8 C13.1
  BottomLayer w20: P1.20 318.22,661.8 v2(386.18,661.8) ; v3(592.18,982.8) 592.18,687.8 ; v2(892.18,661.8) 878.18,647.8 632.18,647.8 v2(618.18,661.8) ; v2(1284.18,919.8) 1254.18,889.8 1254.18,584.8 1463.18,375.8 1598.18,375.8 1627.52,346.46 v2(1627.52,316.38) ; v2@592.18,661.8 592.18,687.8 ; v2@592.18,661.8 v2(618.18,661.8) ; v2@592.18,661.8 604.18,673.8 606.18,673.8 ; 592.18,687.8 606.18,673.8 ; 606.18,673.8 v2(618.18,661.8)
VDDA: C15.1 R7.2 U3.9 | length 220.8
  TopLayer w10: R7.2 C15.1 790.47,1051.8 U3.9
pads on no net: P_HUSB1.A8 P_HUSB1.B8 P_USB.A8 P_USB.B8 S2.0 S2.2 U3.0

## Polygon pours and split planes (outlines as drawn)
GND on BottomLayer "BottomLayer-GND" (hatched 90Degree grid 8 track 8, remove dead copper, pour order 1): -12.82,2033.8 1752.18,2033.8 1783.18,2002.8 1809.18,1976.8 1809.18,1926.8 1809.18,42.8 1780.18,13.8 1759.18,-7.2 1682.18,-7.2 43.18,-7.2 11.18,24.8 -12.82,48.8 -12.82,2033.8
GND on TopLayer "TopLayer-GND" (hatched 90Degree grid 8 track 8, remove dead copper, pour order 0): -17.82,2030.8 1756.18,2030.8 1789.18,1997.8 1810.18,1976.8 1810.18,1898.8 1810.18,41.8 1775.18,6.8 1760.18,-8.2 1655.18,-8.2 42.18,-8.2 9.18,24.8 -17.82,51.8 -17.82,2030.8

## Keep-outs
KeepOutLayer:
  the board outline again, w8

## Silkscreen, mask and mechanical layers (free items; w line width, h text height)
TopOverlay:
  lines w8: 399.38,591.6 399.38,1487.6 ; 1550.98,915.98 1424.18,915.98 1424.18,1373.98 1551.98,1373.98
  text "CH32F103C-R0-1v1" at 1265.58,1968 h32
  text "ON" at 936.18,1794.41 h32
  text "OFF" at 1088.31,1794.41 h32
  text "GND" at 73.21,1758.6 h32
  text "LED1" at 1544.78,1498.6 h32
  text "LED2" at 1670.18,1498.6 h32
  text "GND" at 303.17,1422.78 h32
  text "VCC" at 417.38,1422.78 h32
  text "SWD" at 1438.18,1383.8 h32
  text "PA0" at 303.17,1320.78 h32
  text "PA1" at 417.38,1320.78 h32
  text "VBAT" at 1289.18,1320.98 h32
  text "VCC" at 1437.18,1320.98 h32
  text "PA2" at 303.17,1220.38 h32
  text "PA3" at 417.38,1220.38 h32
  text "PB9" at 1319.17,1219.8 h32
  text "PA13" at 1437.18,1219.8 h32
  text "PC13" at 1294.18,1123.98 h32
  text "PA14" at 1437.18,1123.98 h32
  text "PA4" at 303.17,1119.4 h32
  text "PA5" at 417.38,1119.4 h32
  text "PB8" at 1319.17,1027.98 h32
  text "NRST" at 1437.18,1027.98 h32
  text "PA6" at 303.17,1019.2 h32
  text "PA7" at 417.38,1019.2 h32
  text "PB7" at 1319.17,931.8 h32
  text "GND" at 1437.18,931.8 h32
  text "PB0" at 303.17,916.2 h32
  text "PB1" at 417.38,916.2 h32
  text "BOOT1" at 253.18,820.6 h32
  text "PB10" at 417.38,820.6 h32
  text "PB6" at 1319.17,810.8 h32
  text "PB5" at 1437.18,810.8 h32
  text "PB4" at 1319.17,722.8 h32
  text "PB3" at 1437.18,722.8 h32
  text "PB11" at 288.17,720.6 h32
  text "PB12" at 417.38,720.6 h32
  text "PB13" at 278.17,621 h32
  text "PB14" at 417.38,621 h32
  text "PA15" at 1294.18,620.8 h32
  text "PA12" at 1437.18,620.8 h32
  text "PA11" at 1304.18,520.76 h32
  text "PA10" at 1437.18,520.76 h32
  text "PA9" at 1319.17,421.8 h32
  text "PA8" at 1437.18,421.8 h32
  text "PB15" at 56.97,224.98 h32
  text "VCC" at 193.78,224.98 h32
  text "BOOT0" at 27.88,176.6 h32
  text "GND" at 193.78,176.6 h32
  text "BOOT1" at 27.88,129.9 h32
  text "GND" at 193.78,129.9 h32
Mechanical1:
  the board outline again, w8

## Text inside footprints (layer, text, board x,y; h text height)
D1: TopOverlay "+" at 1528.51,1766 h32 r90
D2: TopOverlay "+" at 1528.51,1830 h32 r90
D3: TopOverlay "+" at 1528.51,1904 h32 r90
P_HUSB0: TopOverlay "D-" at 624.29,373.1 h32; TopOverlay "D+" at 714.29,373.1 h32; TopOverlay "V" at 544.29,373.1 h32; TopOverlay "G" at 824.29,373.1 h32